# Altium PCB PrintNC_GRBLHAL_Breakout_QWIIC_CARD.pcbdoc (part 2 of 2)
Units mm, origin at the board's own origin, x right, y up, seen from the top; angles counter-clockwise.
Board outline 32.38 x 20 mm, 2 copper layers (Top Layer, Bottom Layer); 19 components, 15 nets, 2519 pads, 22 vias.
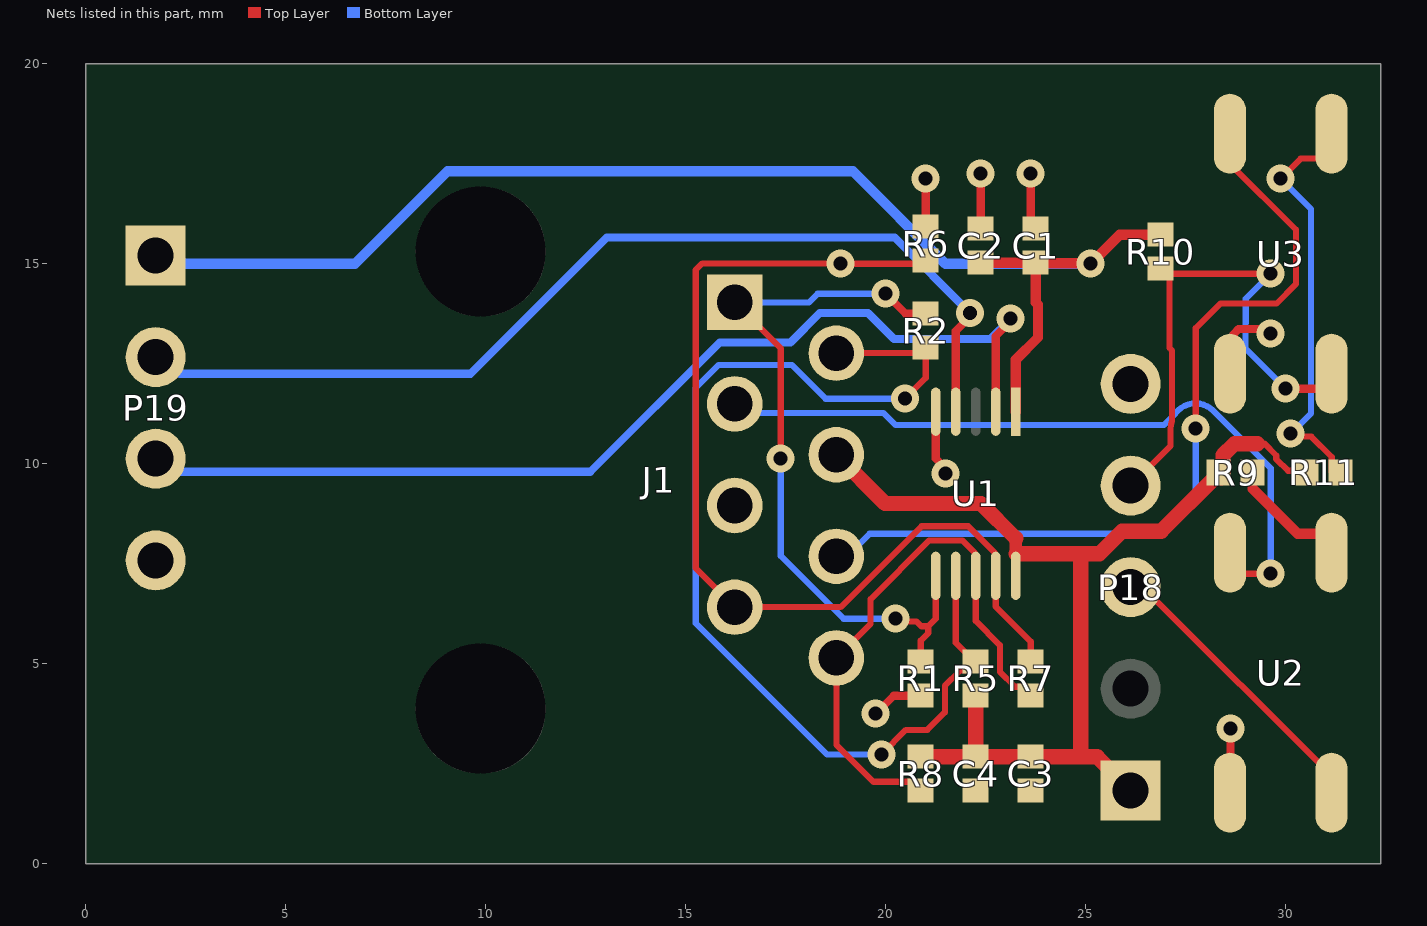
[diagram p2: the nets of this part, all layers, seen from the top]

## Via types
v1: diameter 0.7, hole 0.35, Top Layer to Bottom Layer, tented both sides, 22 vias

## Nets (pads, with @x,y where several pads share a name; then routed paths per layer and width w, separated by ;. In a path a pad name is that pad's centre, name@x,y a point inside that pad or via, vN(x,y) a via of type N, cw(c..) or ccw(c..) an arc to the next point about the centre after c; other vN are vias at no path point)
+3.3V: C1.2 C2.2 P19.1 R10.2 U1.1 | length 34.1
  Top Layer w0.254: C2.2@22.375,15.025 C1.2@23.75,15.025 ; U1.1@23.25,11.302 23.25,12.6 23.805,13.155 23.805,13.976 23.75,14.031 C1.2@23.75,15.025 ; R10.2@26.875,15.725 25.85,15.725 v1(25.125,15) 25.112,15.012 23.763,15.012 C1.2@23.75,15.025
  Bottom Layer w0.254: P19.1@1.695,15 6.733,15 9.044,17.311 19.18,17.311 21.491,15 v1(25.125,15)
+5V: C3.2 C4.2 J1.4 P18.1 R5.1 R8.1 R9.1 R11.1 U1.10 | length 27.1
  Top Layer w0.152: 29.294,10.5 29.47,10.5 29.764,10.206 29.764,10.118 30.057,9.824 30.301,9.824 R11.1@30.525,9.6
  Top Layer w0.305: 23.25,8.138 23.25,7.75 U1.10@23.261,7.75
  Top Layer w0.381: J1.4@18.765,10.225 19.984,9.006 22.381,9.006 23.25,8.138 ; R8.1@20.875,2.675 C4.2@22.25,2.675 ; R5.1@22.25,4.2 C4.2@22.25,2.675 ; U1.10@23.261,7.75 24.875,7.75 ; P18.1@26.125,1.835 25.285,2.675 24.875,2.675 ; 29.294,10.5 28.719,10.5 28.435,10.216 28.435,9.685 28.391,9.641 28.216,9.641 26.887,8.312 25.904,8.312 25.343,7.75 24.875,7.75 ; C4.2@22.25,2.675 C3.2@23.625,2.675 24.875,2.675 ; 24.875,2.675 24.875,7.75
GND: C1.1 C2.1 C3.1 C4.1 J1.5 P18.5 P19.4 R1.2 R6.2 U1.5 U2.3 U3.3 | length 11.5
  Top Layer w0.203: v1(19.75,3.75) 20.2,4.2 R1.2@20.875,4.2 ; R6.2@21,15.925 v1(21,17.125) ; U1.5@21.25,11.302 21.25,10.134 21.5,9.884 v1(21.5,9.75) ; C2.1@22.375,15.875 v1(22.375,17.25) ; v1(23.625,17.25) 23.625,16 C1.1@23.75,15.875 ; U2.3@28.605,1.375 28.615,1.385 28.615,3.365 v1(28.625,3.375) ; U3.3@28.605,11.75 28.699,11.844 28.699,13.246 28.818,13.365 29.376,13.365 29.491,13.25 v1(29.625,13.25)
HALT: P18.3 U2.4 | length 7.7
  Top Layer w0.152: P18.3@26.125,6.765 26.58,6.765 31.145,2.2 U2.4@31.145,1.375
HALT_KEYPAD: J1.3 U2.2 | length 18.2
  Top Layer w0.152: U2.2@28.605,7.375 28.729,7.251 v1@29.624,7.251
  Bottom Layer w0.152: J1.3@16.225,11.495 16.451,11.269 19.943,11.269 20.247,10.966 26.952,10.966 27.24,11.254 cw(c27.745,10.879) 28.122,11.383 cw(c27.745,10.879) 28.123,11.382 cw(c27.75,10.875) 28.218,11.295 29.625,9.889 v1(29.625,7.25)
KPSTR: P18.4 R10.1 U3.4 | length 13.2
  Top Layer w0.152: P18.4@26.125,9.83 26.5,9.83 27.121,10.451 27.121,10.862 cw(c27.75,10.875) 27.154,11.077 27.154,12.835 27.096,12.893 27.096,14.654 R10.1@27,14.75 ; R10.1@26.875,14.875 R10.1@27,14.75 ; v1(29.625,14.75) R10.1@27,14.75
  Top Layer w0.203: v1(30,11.875) 31.02,11.875 U3.4@31.145,11.75
  Bottom Layer w0.152: v1(29.625,14.75) 29,14.125 29,13.515 28.996,13.511 28.996,12.879 v1(30,11.875)
KPSTR_KEYPAD: J1.6 U3.2 | length 20.6
  Top Layer w0.152: v1(27.75,10.875) 27.75,13.39 28.364,14.004 29.769,14.004 30.254,14.489 30.254,15.856 28.605,17.505 U3.2@28.605,17.75
  Bottom Layer w0.152: J1.6@18.765,7.685 19.033,7.685 19.598,8.25 26.701,8.25 27.75,9.299 v1(27.75,10.875)
NetR9_2: R9.2 U2.1 | length 3.2
  Top Layer w0.254: 29.175,9.375 30.302,8.248 30.893,8.248 31.145,7.996 U2.1@31.145,7.375
NetR11_2: R11.2 U3.1 | length 10.4
  Top Layer w0.152: v1(29.875,17.125) 30.376,17.626 31.021,17.626 U3.1@31.145,17.75 ; v1(30.125,10.75) 30.198,10.677 30.643,10.677 31.151,10.169 31.151,9.799 R11.2@31.375,9.575
  Bottom Layer w0.152: v1(29.875,17.125) 30.629,16.371 30.629,11.254 v1(30.125,10.75)
SCL: P19.2 U1.4 | length 24.6
  Top Layer w0.203: U1.4@21.75,11.302 21.75,13.319 22.11,13.679 v1(22.11,13.77)
  Bottom Layer w0.203: P19.2@2.353,12.25 9.621,12.25 13.026,15.655 20.226,15.655 v1(22.11,13.77)
SCL_EXT+: J1.2 R2.1 R5.2 U1.7 | length 27.5
  Top Layer w0.152: J1.2@18.765,12.765 20.865,12.765 R2.1@21,12.9 21,12.148 v1(20.477,11.625) ; v1(19.895,2.735) 20.504,3.344 21.039,3.344 21.479,3.784 21.479,4.449 21.856,4.826 22.026,4.826 R5.2@22.25,5.05 ; U1.7@21.75,7.198 21.75,5.525 R5.2@22.225,5.05
  Bottom Layer w0.152: v1(19.895,2.735) 18.527,2.735 15.251,6.011 15.251,11.899 15.821,12.469 17.653,12.469 18.497,11.625 v1(20.477,11.625)
SCL_EXT-: J1.1 R1.1 R2.2 U1.6 | length 18.6
  Top Layer w0.152: J1.1@16.225,14.035 17.375,12.885 v1(17.375,10.125) ; v1(20.25,6.125) 20.315,6.06 20.768,6.06 20.89,5.938 21.063,5.938 ; R1.1@20.875,5.05 20.875,5.579 21.063,5.766 21.063,5.938 ; U1.6@21.25,7.198 21.25,6.125 21.063,5.938
  Top Layer w0.203: v1(20,14.25) 20.5,13.75 R2.2@21,13.75
  Bottom Layer w0.152: J1.1@16.225,14.035 18.083,14.035 18.298,14.25 v1(20,14.25) ; v1(17.375,10.125) 17.375,7.697 18.947,6.125 v1(20.25,6.125)
SDA: P19.3 U1.2 | length 25.9
  Top Layer w0.203: U1.2@22.75,11.302 22.75,13.189 23.125,13.564 v1(23.125,13.625)
  Bottom Layer w0.203: P19.3@1.833,9.75 1.883,9.8 12.613,9.8 15.849,13.035 17.622,13.035 18.351,13.765 19.56,13.765 20.209,13.115 22.615,13.115 v1(23.125,13.625)
SDA_EXT+: J1.8 R7.1 R8.2 U1.8 | length 14.2
  Top Layer w0.152: R8.2@20.875,1.825 20.651,2.049 19.692,2.049 18.765,2.976 J1.8@18.765,5.145 19.621,6.001 19.621,6.617 21.086,8.082 21.914,8.082 22.234,7.762 22.234,7.214 U1.8@22.25,7.198 22.25,6.07 22.854,5.466 22.854,4.801 23.231,4.424 23.401,4.424 R7.1@23.625,4.2
SDA_EXT-: J1.7 R6.1 R7.2 U1.9 | length 25.4
  Top Layer w0.152: R6.1@21,15.075 20.925,15 v1(18.875,15) 18.866,15.009 15.414,15.009 15.251,14.846 15.251,7.389 J1.7@16.225,6.415 18.873,6.415 20.895,8.437 22.062,8.437 22.734,7.765 22.734,7.214 U1.9@22.75,7.198 22.75,6.426 23.625,5.551 R7.2@23.625,5.05
pads on no net: J1. P18.2 U1.3

## Polygon pours and split planes (outlines as drawn)
GND on Top Layer "GND_L01_P000" (solid, remove dead copper, pour order 0): -1.5,-0.25 37.625,-0.25 37.625,19.5 -1.5,19.5
GND on Bottom Layer "GND_L02_P001" (solid, remove dead copper, pour order 1): -1.5,-0.25 37.625,-0.25 37.625,19.5 -1.5,19.5

## Silkscreen, mask and mechanical layers (free items; w line width, h text height)
Top Overlay:
  text "QWIIC" at 1,18 h1.78
Bottom Overlay:
  drawing of 1270 lines, arcs and shapes, not listed
  text "PCB_REV '.VarRevNo'" at 30.25,17.5 h1.27 r90
  text "Licensed under CERN-OHL-P v2" at 31.612,17.5 h1.27 r90
  text "Expatria" at 5.941,16.052 h1.52 r90
  text "Technologies" at 8.367,12.764 h1.02 r90
Bottom Solder:
  region: 7.062,2.588 7.661,2.557 7.661,2.68 7.073,2.649 cw(c7.073,2.718) 7.005,2.706 cw(c7.159,2.712) 7.006,2.725 7.109,3.311 6.891,3.232 cw(c6.868,3.313) 6.875,3.229 cw(c6.875,3.273) 6.841,3.245 6.321,3.887 6.254,3.743 cw(c6.214,3.761) 6.214,3.717 cw(c6.214,3.762) 6.2,3.719 5.81,3.846 5.888,3.477 cw(c5.837,3.471) 5.862,3.427 5.694,3.355 6.003,3.067 cw(c5.973,3.035) 6.017,3.035 cw(c5.971,3.036) 5.978,2.991 cw(c5.983,3.336) 5.964,2.991 5.247,3.13 5.376,2.907 cw(c5.338,2.885) 5.382,2.885 cw(c5.338,2.885) 5.358,2.845 4.913,2.619 5.358,2.392 cw(c5.338,2.353) 5.382,2.353 cw(c5.338,2.353) 5.376,2.33 5.247,2.107 5.964,2.246 cw(c5.968,2.196) 6.017,2.208 cw(c5.966,2.205) 6.003,2.171 5.694,1.882 5.862,1.81 cw(c5.845,1.77) 5.889,1.77 5.81,1.391 6.2,1.518 cw(c6.214,1.476) 6.214,1.52 cw(c6.214,1.476) 6.254,1.495 6.321,1.35 6.841,1.992 cw(c6.875,1.964) 6.875,2.008 cw(c6.875,1.964) 6.891,2.006 7.109,1.926 7.006,2.512 cw(c7.286,2.536) 7.005,2.527 cw(c7.07,2.523)
Mechanical 6:
  the board outline again, w0.254
Mechanical 15:
  lines w0.254: -8.091,53.291 -8.091,55.831 ; -2.114,55.787 18.206,55.787 ; -2.114,58.327 18.206,58.327 ; 7.601,58.161 10.141,58.161 ; 9.82,44.257 10.454,43.622 ; 10.141,55.621 7.601,55.621 ; 20.746,55.787 41.066,55.787 ; 20.746,58.327 41.066,58.327 ; 41.066,7.528 41.066,53.247 ; 46.146,8.162 46.146,53.247 ; 97.277,65.69 102.357,65.69 ; 97.277,68.23 97.277,70.77 97.277,70.77 ; 141.828,66.086 162.148,66.086 ; 141.828,68.626 162.148,68.626 162.148,66.086 ; 180.69,136.996 180.69,139.536 180.69,139.536 ; 216.377,66.086 211.932,66.086 ; -8.091,55.831 -8.091,55.831 ; 7.601,55.621 7.601,55.621 ; 162.148,66.086 162.148,66.086 ; 183.992,66.086 163.672,66.086 163.672,68.626 183.992,68.626 183.992,66.086 ; 183.992,66.086 183.992,66.086 ; 186.532,66.086 186.532,66.086 ; 186.532,66.086 186.532,68.626 ; 186.532,66.086 206.852,66.086 206.852,68.626 ; 186.532,68.626 206.852,68.626 ; 186.532,68.626 186.532,68.626 ; 206.852,68.626 206.852,68.626 ; 211.932,66.086 211.932,66.086 ; -25.871,53.292 -25.871,55.832 -25.871,55.831 -10.631,55.831 -10.631,55.831 -10.631,53.292 -25.871,53.292
Drill Drawing:
  lines w0.254: -37.75,82.85 89.25,82.85 89.25,-18.75